# Altium PCB powerhq.PcbDoc
Units mil, origin at the board's own origin, x right, y up, seen from the top; angles counter-clockwise.
Board outline 2010 x 1585 mil, 2 copper layers (Top Layer, Bottom Layer); 27 components, 25 nets, 139 pads, 20 vias.
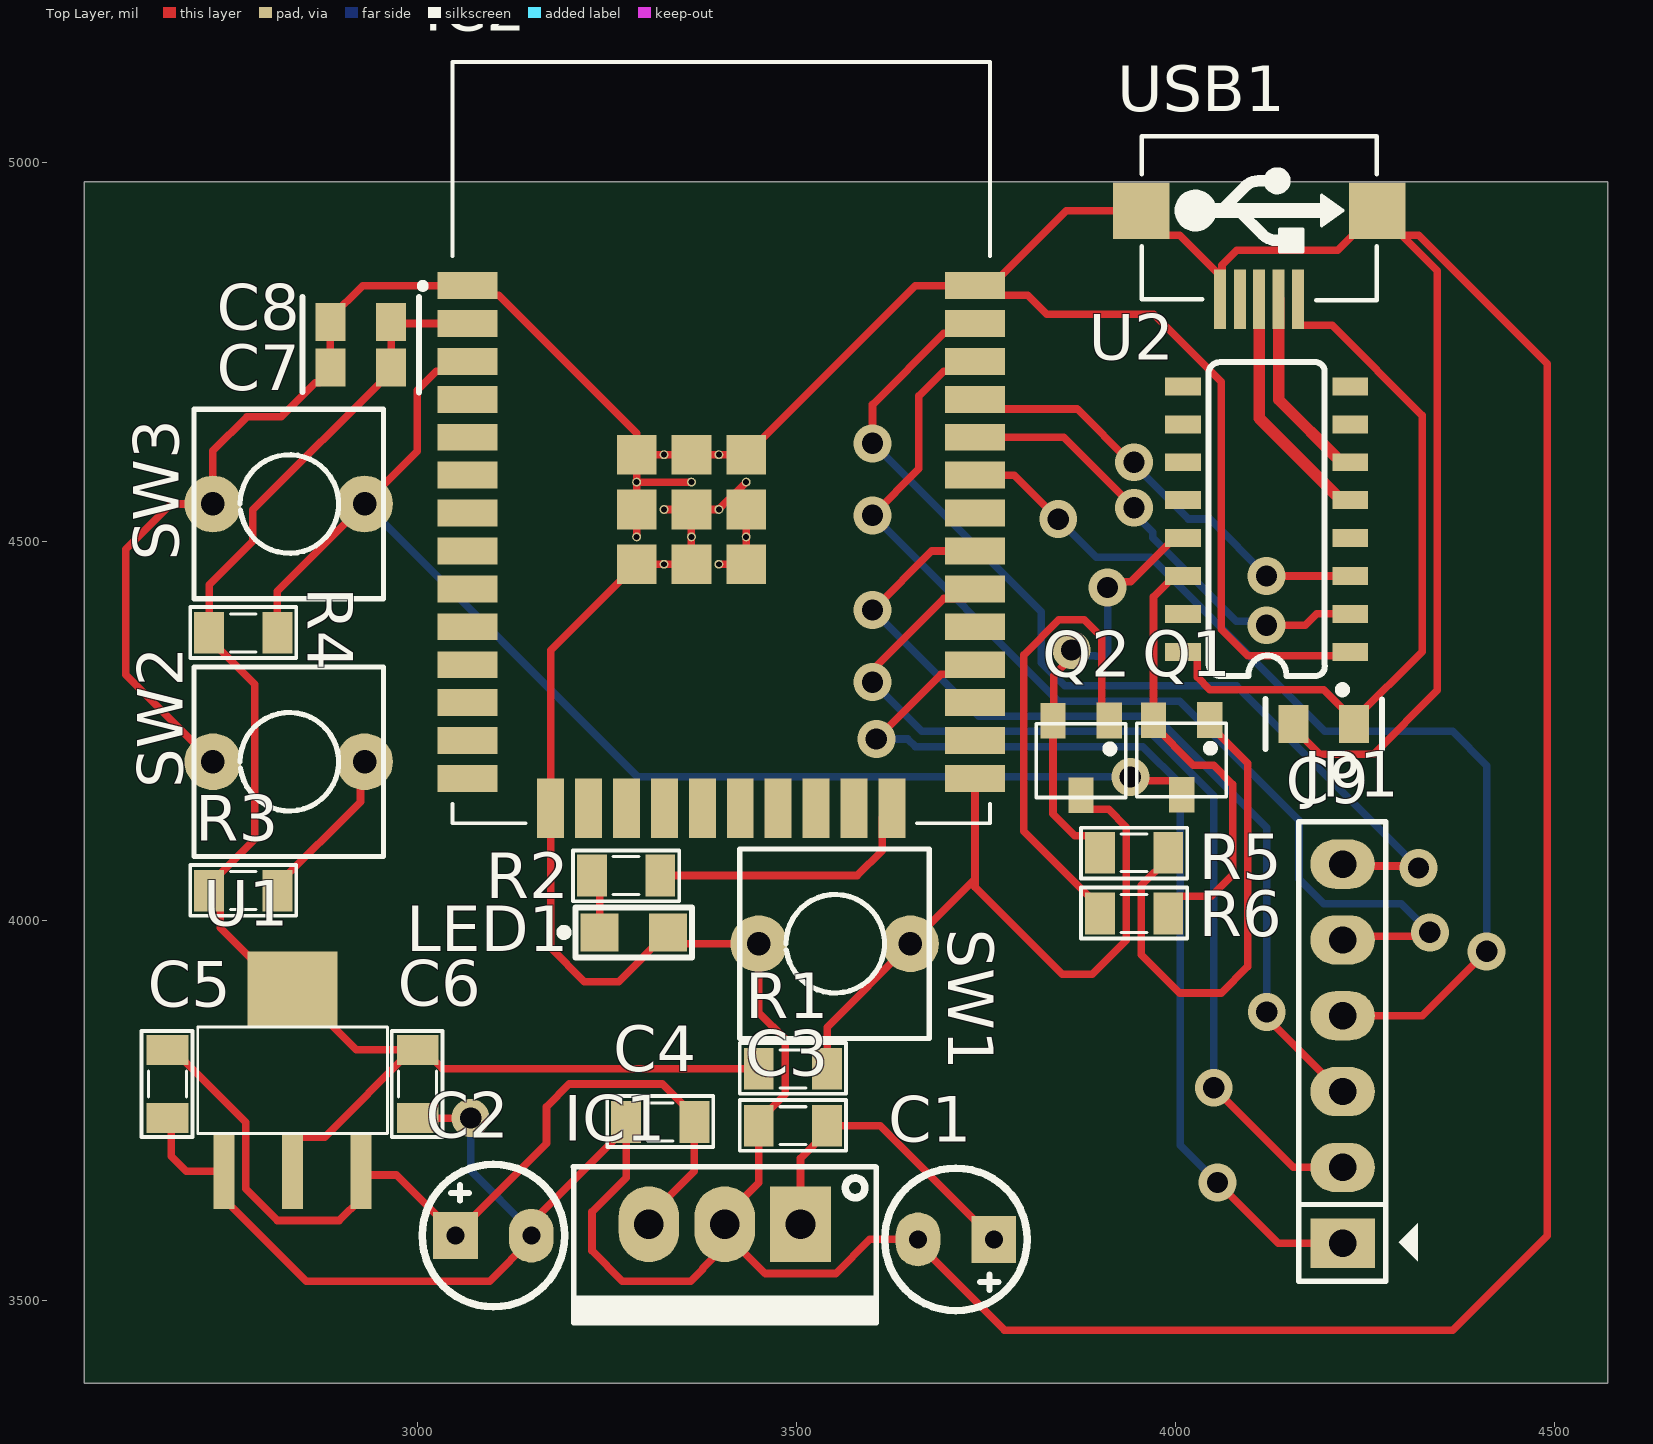
[diagram p0: Top Layer view]
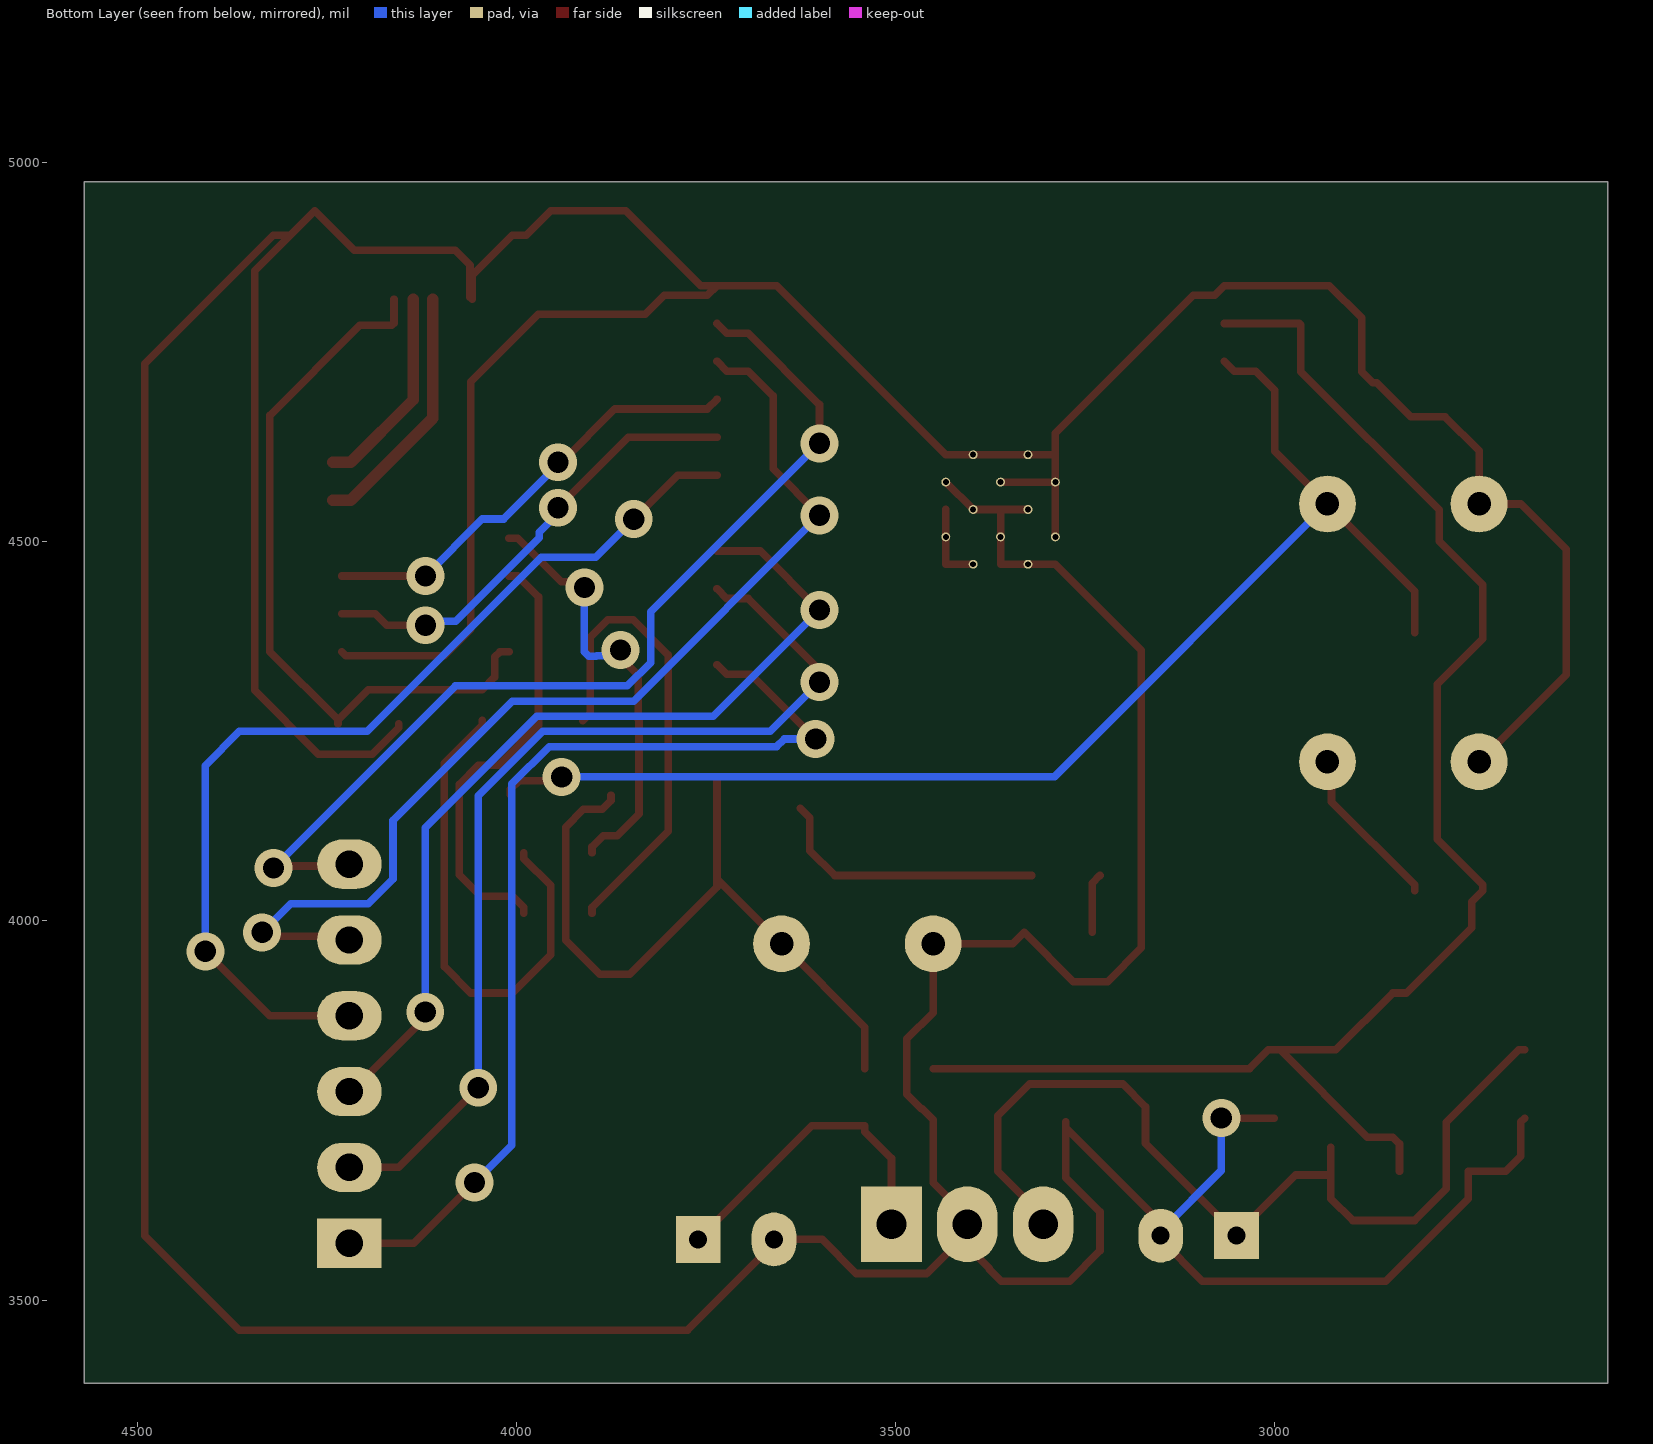
[diagram p1: Bottom Layer view, seen from below]
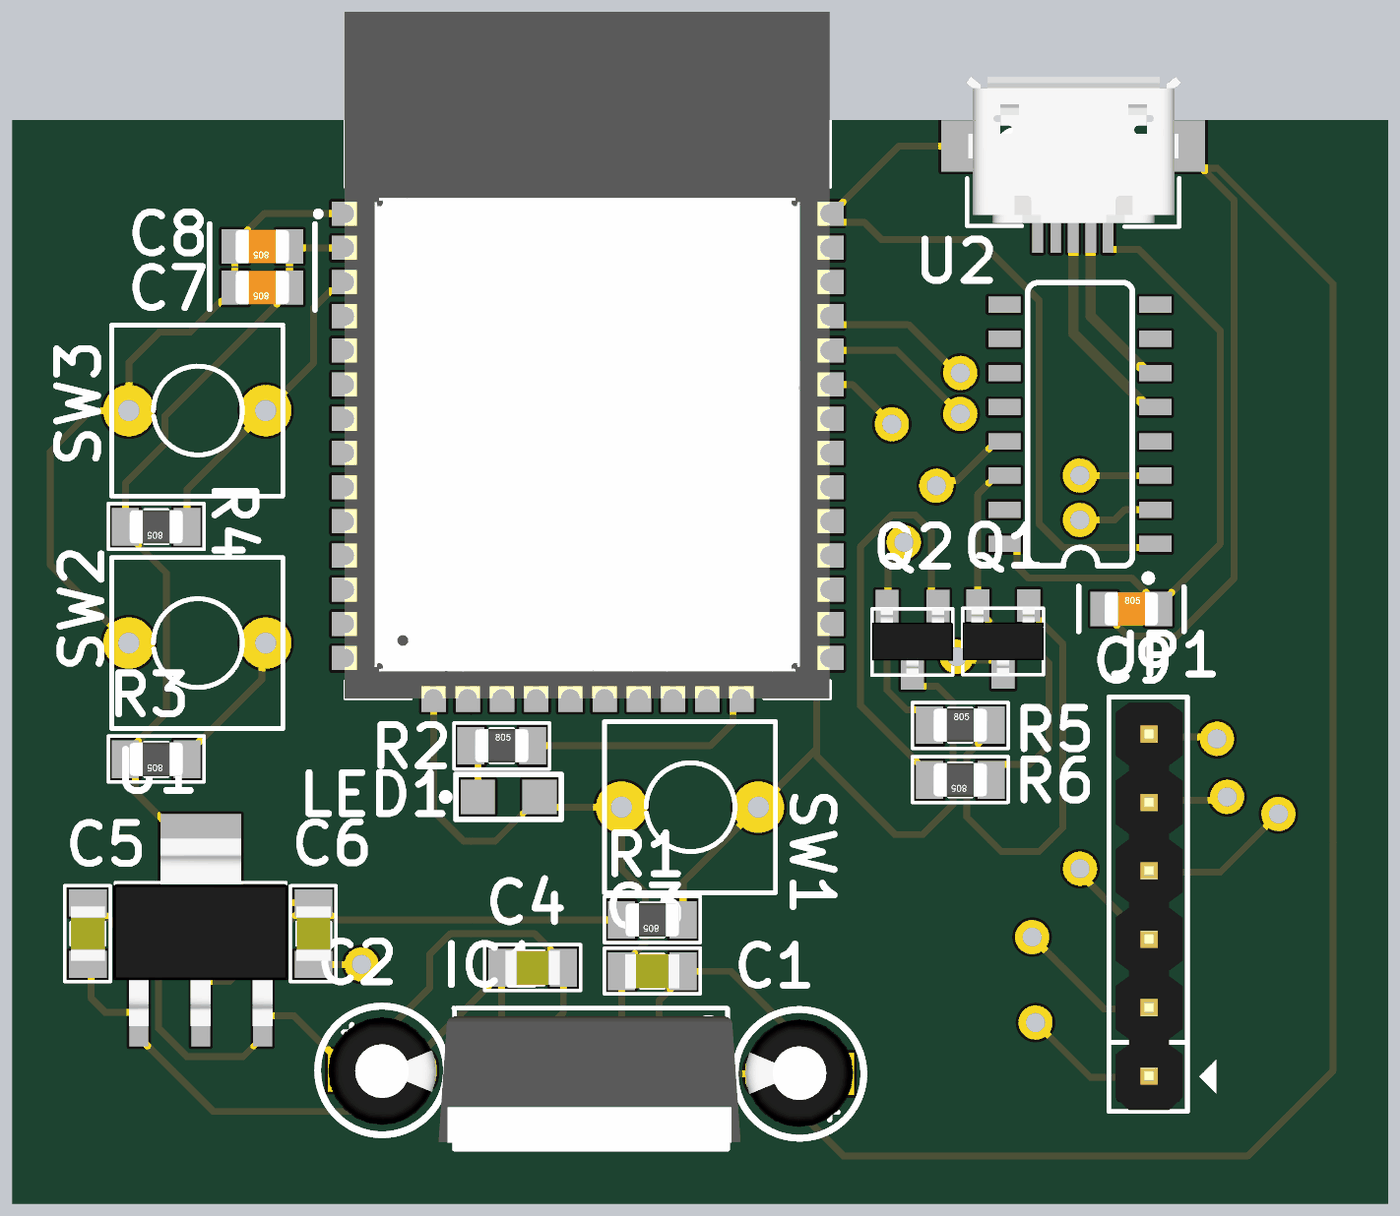
[diagram p2: 3D render of the assembled board from above, using the file's embedded part models]

## Layer stack, top to bottom
Top Solder: solder mask 0.4, Solder Resist, Dk 3.5
Top Layer: signal copper 1.4
Dielectric 1: dielectric 12.6, FR-4, Dk 4.8
Bottom Layer: signal copper 1.4
Bottom Solder: solder mask 0.4, Solder Resist, Dk 3.5

## Board outline
2560,3390 4570,3390 4570,4975 2560,4975

## Design rules (kind name [scope] priority, off if disabled: settings)
Clearance [All] p1: gap=10 ignorepadtopadclearanceinfootprint=FALSE except(0: Arc-Hole Track-Hole SMDPad-Hole THPad-Hole Via-Hole Fill-Hole Poly-Hole Region-Hole Text-Hole)
DiffPairsRouting [All] p1: maxlimit=10 minlimit=10 mostfreqgap=10 toplayer_minwidth=15 toplayer_maxwidth=15 toplayer_prefwidth=15 bottomlayer_minwidth=15 bottomlayer_maxwidth=15 bottomlayer_prefwidth=15 maxuncoupledlength=500
PolygonConnect [All] p1: connectstyle=Relief reliefconductorwidth=10 reliefentries=4 polygonreliefangle="90 Angle" airgapwidth=10
RoutingVias [All] p1: holewidth=28 width=50 viastyle="Through Hole" minholewidth=28 minwidth=50 maxholewidth=28 maxwidth=50
SolderMaskExpansion [All] p1: expansion=4 istentingtop=FALSE
Width [All] p1: maxlimit=10 minlimit=10 preferedwidth=10
29 further rules are at their usual default settings.

## Classes and differential pairs
differential pair class diff: D0
component class MCU: C7 C8 C9 IC2 JP1 LED1 Q1 R1 R2 R3 R4 R5 R6 SW1 SW2 SW3 U2 USB1
component class POWER: C1 C2 C3 C4 C5 C6 IC1 U1
differential pair D0: +D0_P -D0_N

## Components (designator, comment, footprint, x,y, rotation, side; value= is the part's Value field where it differs from the comment)
C1 "25V/10uF" C3MM 3710,3580 r180 top
C2 "10V/1uF" C3MM 3100,3585 r0 top
C3 "100nF" CAP_0805 3495,3730 r180 top value=33p
C4 "100nF" CAP_0805 3320,3735 r180 top value=33p
C5 "10uF" CAP_0805 2670,3785 r270 top value=33p
C6 "22uF" CAP_0805 3000,3785 r270 top value=33p
C7 "10uF" C0805 2925,4730 r180 top value=33p
C8 "10uF" C0805 2925,4790 r180 top value=33p
C9 "100nF" C0805 4195,4260 r0 top value=33p
IC1 "LM7805" QTO-220 3505,3600 r180 top
IC2 "ESP32-WROOM-32" MODULE_ESP32-WROOM-32 3400.49,4630.94 r0 top
JP1 "JP6 PIN" JP6 4220,3575 r90 top value=JP7
LED1 "LED" LED0805 3285,3985 r0 top value="LED 3 ly Single Colour"
Q1 "C1815" SOT23D 4007.6,4215.79 r180 top
Q2 "C1815" SOT23D 3875,4215 r180 top
R1 "10k" RES-SMD-0805 3495,3805 r180 top
R2 "Resistor - SMD" RES-SMD-0805 3275,4060 r0 top
R3 "10k" RES-SMD-0805 2770,4040 r180 top
R4 "10k" RES-SMD-0805 2770,4380 r180 top
R5 "10k" RES-SMD-0805 3945,4090 r0 top
R6 "10k" RES-SMD-0805 3945,4010 r180 top
SW1 "SW" SW2 3650,3970 r180 top value="SW chip 2 pin"
SW2 "SW" SW2 2930,4210 r180 top value="SW chip 2 pin"
SW3 "SW" SW2 2930,4550 r180 top value="SW chip 2 pin"
U1 "LM1117-ADJ" LM1117-SOP 2835,3720 r0 top
U2 "CH340C" SOP-16 4119.76,4530 r90 top
USB1 "USB" USB-M1 4110,4820 r0 top

## Footprints (in the part's own frame and the unit in brackets; to place one, negate y for a bottom-side part, rotate by r counter-clockwise, add the part's x,y. Pads: shape width x height; smd on the part's side, far side on the other; paste and mask are expansions set on the pad)
C3MM [mm]
  rect 1.5x1.58 hole 0.6: 1(-1.27,0)
  oval 1.5x1.8 hole 0.6: 2(1.27,0)
  silkscreen extent -2.39,-2.39 2.39,2.39, body extent -2,-2.03 1.99,1.97, height 7.01
C0805 [mil] "Chip Resistor; Body 2.0 x 1.3 mm (LxW typ)"
  rect 39.37x50 smd: 1(-40,0) 2(40,0)
  silkscreen extent -77,-33 77,33, body extent -39,-25 39,25, height 31
CAP_0805 [mil]
  rect 39.37x55 smd: 1(-45,0) 2(45,0)
  silkscreen extent -70,-34 70,33, body extent -40,-25 40,25, height 24
JP6 [mil] "JP6"
  rect 65x85 hole 36: 1(0,0)
  oval 65x85 hole 36: 2(100,0) 3(200,0) 4(300,0) 5(400,0) 6(500,0)
  silkscreen extent -50,-99 556,58, body extent -48,-50 548,48, height 323
LED0805 [mil] "Chip Resistor; Body 2.0 x 1.3 mm (LxW typ)"
  rect 50x50 smd: 1(-45,0) 2(45,0)
  silkscreen extent -97,-33 77,33, body extent -60,-25 60,25, height 47
LM1117-SOP [mm]
  rect 0.7x2.54 smd: 1(-2.3,-1.27) 2(0,-1.27) 3(2.3,-1.27)
  rect 3x2.54 smd: 2(0,4.826)
  silkscreen extent -3.17,0 3.17,3.56, body extent -3.25,-1.78 3.25,5.18, height 1.68
MODULE_ESP32-WROOM-32 [mm]
  rect 2x0.9 smd: 1(-8.5,5.26) 2(-8.5,3.99) 3(-8.5,2.72) 4(-8.5,1.45) 5(-8.5,0.18) 6(-8.5,-1.09) 7(-8.5,-2.36) 8(-8.5,-3.63) 9(-8.5,-4.9) 10(-8.5,-6.17) 11(-8.5,-7.44) 12(-8.5,-8.71) 13(-8.5,-9.98) 14(-8.5,-11.25) 25(8.5,-11.25) 26(8.5,-9.98) 27(8.5,-8.71) 28(8.5,-7.44) 29(8.5,-6.17) 30(8.5,-4.9) 31(8.5,-3.63) 32(8.5,-2.36) 33(8.5,-1.09) 34(8.5,0.18) 35(8.5,1.45) 36(8.5,2.72) 37(8.5,3.99) 38(8.5,5.26)
  rect 0.9x2 smd: 15(-5.715,-12.25) 16(-4.445,-12.25) 17(-3.175,-12.25) 18(-1.905,-12.25) 19(-0.635,-12.25) 20(0.635,-12.25) 21(1.905,-12.25) 22(3.175,-12.25) 23(4.445,-12.25) 24(5.715,-12.25)
  rect 1.33x1.33 smd: 39_1(-2.835,-0.405) 39_2(-1,-0.405) 39_3(0.835,-0.405) 39_4(-2.835,-2.24) 39_5(-1,-2.24) 39_6(0.835,-2.24) 39_7(-2.835,-4.075) 39_8(-1,-4.075) 39_9(0.835,-4.075)
  round 0.3 hole 0.2: 39_10(-1.917,-0.405) 39_11(-0.082,-0.405) 39_12(-2.835,-1.322) 39_13(-1,-1.322) 39_14(0.835,-1.322) 39_15(-1.917,-2.24) 39_16(-0.082,-2.24) 39_17(-2.835,-3.157) 39_18(-1,-3.157) 39_19(0.835,-3.157) 39_20(-1.917,-4.075) 39_21(-0.082,-4.075)
  silkscreen extent -10.1,-12.75 9,12.75, body extent -9.02,-12.75 8.98,12.75, height 3.2
QTO-220 [mil] "TO-220 - 1-2-3"
  rect 80x100 hole 39: 1(0,0)
  oval 80x100 hole 39: 2(100,0) 3(200,0)
  silkscreen extent -100,-76 300,130, body extent -119,-64 322,121, height 755
RES-SMD-0805 [mil]
  rect 39.37x55 smd: 1(-45,0) 2(45,0)
  silkscreen extent -70,-34 70,33, body extent -39,-25 39,25, height 31
SOP-16 [mm]
  rect 0.6x1.2 smd: 1(-4.445,-2.8) 2(-3.175,-2.8) 3(-1.905,-2.8) 4(-0.635,-2.8) 5(0.635,-2.8) 6(1.905,-2.8) 7(3.175,-2.8) 8(4.445,-2.8) 9(4.445,2.8) 10(3.175,2.8) 11(1.905,2.8) 12(0.635,2.8) 13(-0.635,2.8) 14(-1.905,2.8) 15(-3.175,2.8) 16(-4.445,2.8)
  silkscreen extent -5.84,-2.67 5.26,1.95, body extent -4.95,-3.47 4.95,3.47, height 1.75
SOT23D [mm] "SOT 23C - 1-3-2 - BCE"
  rect 0.85x1.2 smd: 1(-0.95,-1.25) 2(0.94,-1.245) 3(0,1.25)
  silkscreen extent -1.5,-1.14 1.5,1.32, body extent -1.5,-1.17 1.5,1.33, height 1.06
SW2 [mil] "SW button 2pin, 250x 250 mil"
  round 75 hole 31: 1(0,0) 2(200,0)
  silkscreen extent -25,-125 225,125
USB-M1 [mm]
  rect 0.4x2 smd: 1(1.3,0) 2(0.65,0) 3(0,0) 4(-0.65,0) 5(-1.321,0)
  rect 1.9x1.9 smd: 5(-3.95,2.968) 5(3.95,2.968)
  silkscreen extent -3.94,-0.03 3.94,5.46, body extent -3.98,0.11 4,5.54, height 2.71

## Part data
C1 C2: library part "Cap Pol", "Polarized Capacitor (Axial)", LatestRevisionDate=17-Jul-2002, LatestRevisionNote="Re-released for DXP Platform.", PackageReference=POLAR0.8, Published=8-Jun-2000, Publisher="Altium Limited"
C3 C4 C5 C6 C7 C8 C9: library part CapSMD, "Capacitor", LatestRevisionDate=17-Jul-2002, LatestRevisionNote="Re-released for DXP Platform.", PackageReference=RAD-0.3, Published=8-Jun-2000, Publisher="Altium Limited"
IC1: library part LM78xx, "On ap +, from + 5 to + 24VDC"
IC2: "Bluetooth, WiFi Transceiver Module 2.4GHz ~ 2.5GHz Surface Mount", Package="Module Espressif Systems", Digi-Key_Part_Number=1904-1010-1-ND, Digi-Key_Purchase_URL=https://www.digikey.com/product-detail/en/espressif-systems/ESP32-WROOM-32/1904-1010-1-ND/8544305?utm_source=snapeda&utm_medium=aggregator&utm_campaign=symbol, MF="Espressif Systems", MP=ESP32-WROOM-32, SnapEDA_Link=https://www.snapeda.com/parts/ESP32-WROOM-32/Espressif%20Systems/view-part/2753322/?ref=snap
JP1: library part JP6
LED1: "LED Single colour Green and Red"
Q1 Q2: library part 2SC1815, "NPN 600mW, ECB"
R1 R3 R4 R5 R6: library part "Resistor - SMD", "Resistor", Manufacturer="Generic Components", Class=Passive, Published=08/06/2000, Publisher="Altium Hobart Technology Centre"
R2: "Resistor SMD", Manufacturer="Generic Components", Class=Passive, Published=08/06/2000, Publisher="Altium Hobart Technology Centre"
SW1 SW2 SW3: library part SW2, "Switch button 2 pin"
U1: "800mA Low-Dropout Linear Regulator", Creator="Nguyen Ba Bien", Website=http://group3i.net
U2: "USB to serial chip CH340", Package=Package, Availability=Unavailable, Check_prices=https://www.snapeda.com/parts/CH340C/WCH/view-part/5428851/?ref=eda, MF=WCH, MP=CH340C, Price=None, SnapEDA_Link=https://www.snapeda.com/parts/CH340C/WCH/view-part/5428851/?ref=snap
USB1: library part USB-M

## Via types
v1: diameter 50, hole 28, Top Layer to Bottom Layer, 20 vias

## Nets (pads, with @x,y where several pads share a name; then routed paths per layer and width w, separated by ;. In a path a pad name is that pad's centre, name@x,y a point inside that pad or via, vN(x,y) a via of type N, cw(c..) or ccw(c..) an arc to the next point about the centre after c; other vN are vias at no path point)
3V3: C6.1 C7.1 C8.1 IC2.2 R1.2 R3.2 R4.2 U1.2 | length 2083.8
  Top Layer w10: U1.2@2835,3670 2835,3706.22 2843.78,3715 2877.18,3715 C6.1@2992.19,3830 ; IC2.2 2966.97,4788.03 2965,4786.06 C7.1 2965,4724.69 2782.5,4542.19 2782.5,4501.09 2725,4443.59 R4.2 2725,4372.19 2785,4312.19 2785,4107.81 2725,4047.81 R3.2 2739.69,4025.31 2739.69,3991.26 2825.94,3905 2844.06,3905 2919.05,3830 C6.1@2992.19,3830 ; R1.2 3032.82,3805 3007.81,3830 C6.1 C6.1@2992.19,3830
5V: C2.1 C4.1 C5.1 IC1.3 U1.3 | length 1248.8
  Top Layer w10: C5.1 2677.81,3830 2773.23,3734.59 2773.23,3646.78 2815.01,3605 2896.77,3605 2925.55,3633.78 U1.3@2925.55,3665 ; U1.3@2925.55,3701.22 U1.3 U1.3@2925.55,3665 ; C2.1 C2.1@3050,3586.57 ; IC1.3 3305,3610 3365,3670 C4.1 3365,3742.81 3322.82,3785 3200,3785 3170,3755 3170,3706.57 C2.1@3050,3586.57 ; U1.3@2925.55,3665 2971.57,3665 C2.1@3050,3586.57
12V: C1.1 C3.1 IC1.1 | length 427.6
  Top Layer w10: IC1.1 3505,3687.18 3540,3722.19 C3.1 3610,3730 3733.9,3606.1 3735.47,3606.1 3760,3581.57 C1.1
D0_N: U2.5 USB1.3 | length 333.4
  Top Layer w15: USB1.3 4110,4663.19 4218.19,4555 U2.5 U2.5@4241.81,4555
D0_P: U2.6 USB1.2 | length 272.8
  Top Layer w15: USB1.2 4135.59,4687.6 4218.19,4605 U2.6 U2.6@4241.81,4605
DTR: Q2.2 R5.1 U2.13 | length 579
  Top Layer w10: v1(3862.43,4357.43) 3862.43,4347.28 3839.22,4324.07 3839.22,4265.22 Q2.2 3838,4141.22 3866.72,4112.5 3885.31,4112.5 3900,4097.81 R5.1 ; v1(3910,4440) 3917.65,4447.65 3940.37,4447.65 3997.72,4505 U2.13
  Bottom Layer w10: v1(3862.43,4357.43) 3870.08,4349.77 3893.51,4349.77 3894.14,4349.14 3904.14,4349.14 3910,4355 v1(3910,4440)
EN: IC2.3 Q1.3 R4.1 SW3.1 | length 1719
  Top Layer w10: R4.1 2815,4435 SW3.1 2999.69,4619.69 2999.69,4700.17 3024.83,4725.31 3053.13,4725.31 IC2.3 ; v1(3940,4190) 3944.8,4185.2 3995.87,4185.2 4007.6,4173.46 Q1.3
  Bottom Layer w10: SW3.1 3290,4190 v1(3940,4190)
GND: C1.2 C2.2 C3.2 C4.2 C5.2 C6.2 C7.2 C8.2 C9.1 IC1.2 IC2.1 IC2.15 IC2.38 IC2.39_1 IC2.39_2 IC2.39_3 IC2.39_4 IC2.39_5 IC2.39_6 IC2.39_7 IC2.39_8 IC2.39_9 IC2.39_10 IC2.39_11 IC2.39_12 IC2.39_13 IC2.39_14 IC2.39_15 IC2.39_16 IC2.39_17 IC2.39_18 IC2.39_19 IC2.39_20 IC2.39_21 LED1.2 SW1.2 SW2.2 SW3.2 U1.1 U2.1 USB1.5 | length 10409.6
  Top Layer w10: C5.2 2675,3735 2675,3690 2695,3670 U1.1 2744.45,3633.78 2853.23,3525 3095,3525 3150,3580 C2.2 3150,3602.18 C4.2@3275,3727.19 ; SW2.2 2615,4325 2615,4490 2675,4550 SW3.2 2730,4620 2775,4665 2820,4665 2865,4710 2870.31,4710 2885,4724.69 C7.2 C8.2 2885,4795.31 2927.72,4838.03 IC2.1 3078.56,4825.31 3106.86,4825.31 3288.88,4643.3 IC2.39_1 ; C6.2 v1(3070,3740) ; C4.2 C4.2@3275,3727.19 ; IC2.39_17 IC2.39_4 IC2.39_12 ; IC2.39_15 IC2.39_5 ; IC2.39_13 IC2.39_12 ; IC2.39_21 IC2.39_9 IC2.39_19 IC2.39_6 ; IC2.39_14 IC2.39_16 IC2.39_5 ; C9.1 4155,4254.69 4189.69,4220 4260.9,4220 4345,4304.1 4345,4857.35 USB1.5@4297.91,4904.44 ; U2.1 4225,4350 4095,4350 4060,4385 4060,4711.17 3971.17,4800 3830,4800 3804.69,4825.31 3747.85,4825.31 IC2.38 ; C4.2@3275,3727.19 3275,3661.25 3230,3616.25 3230,3565 3270,3525 3360,3525 3375.8,3540.8 3375.8,3541.86 3405,3571.06 IC1.2@3405,3588.79 ; IC2.39_12 IC2.39_1 ; IC2.39_1 IC2.39_10 IC2.39_2 IC2.39_11 IC2.39_3 3656.4,4838.03 IC2.38 ; IC2.39_5 IC2.39_18 IC2.39_8 IC2.39_20 IC2.39_7 3175.49,4357.13 IC2.15 3175.49,3964.51 3220,3920 3265,3920 LED1.2 3345,3970 SW1.2 3450,3879.19 3484.69,3844.51 3484.69,3771.29 3465.9,3752.5 3464.69,3752.5 3450,3737.81 C3.2 3450,3655 3405,3610 IC1.2 IC1.2@3405,3588.79 ; IC1.2@3405,3588.79 3458.79,3535 3551.21,3535 3596.21,3580 C1.2 3660,3574.09 3774.09,3460 4365,3460 4490,3585 4490,4735 4320.56,4904.44 USB1.5@4297.91,4904.44 ; IC2.38 3756.79,4838.03 3855.6,4936.84 3954.49,4936.84 3986.89,4904.44 4005.06,4904.44 4058,4851.5 4058,4820 4060.87,4822.87 4060.87,4864.92 4080.63,4884.68 4213.35,4884.68 4265.51,4936.84 USB1.5@4297.91,4904.44
  Bottom Layer w10: v1(3070,3740) 3070,3670.91 3150,3590.91 C2.2
IO_0: IC2.25 Q2.3 R1.1 SW1.1 | length 969.9
  Top Layer w10: R1.1 3540,3860 SW1.1 3735.14,4055.14 ; IC2.25 3735.14,4055.14 ; Q2.3 3875,4158.9 3886.73,4147.16 3911.23,4147.16 3934.68,4123.71 3934.68,4048.14 3934.69,3974.69 3890,3930 3850,3930 3735.14,4044.86 3735.14,4055.14
IO_2: IC2.24 R2.2 | length 367.5
  Top Layer w10: R2.2 3580,4060 3612.78,4092.78 3612.78,4135.94 IC2.24
IO_16: R3.1 SW2.1 | length 217.6
  Top Layer w10: R3.1 2815,4047.81 2924.69,4157.5 2924.69,4204.69 SW2.1
NetIC2_28: IC2.28 JP1.1 | length 1340.4
  Top Layer w10: v1(3605,4240) 3690.31,4325.31 3722.42,4325.31 IC2.28 ; v1(4055,3655) 4135,3575 JP1.1
  Bottom Layer w10: v1(3605,4240) 3646.72,4240 3656.72,4230 3956.57,4230 4005.78,4180.78 4005.78,3704.22 v1(4055,3655)
NetIC2_30: IC2.30 JP1.2 | length 1306.1
  Top Layer w10: v1(3600,4315) 3600,4331.19 3694.12,4425.31 3722.42,4425.31 IC2.30 ; v1(4050,3780) 4155,3675 JP1.2
  Bottom Layer w10: v1(3600,4315) 3665,4250 3964.85,4250 4050,4164.85 v1(4050,3780)
NetIC2_31: IC2.31 JP1.3 | length 1197.3
  Top Layer w10: v1(3600,4410) 3678.03,4488.03 IC2.31 ; v1(4120,3880) 4120,3872.5 4217.5,3775 JP1.3
  Bottom Layer w10: v1(3600,4410) 3740,4270 3973.14,4270 4120,4123.14 v1(4120,3880)
NetIC2_33: IC2.33 JP1.4 | length 1303.7
  Top Layer w10: IC2.33 3786.97,4588.03 v1(3845,4530) ; JP1.4 4325,3875 v1(4410,3960)
  Bottom Layer w10: v1(3845,4530) 3895,4480 3966.72,4480 4196.72,4250 4365,4250 4410,4205 v1(4410,3960)
NetIC2_36: IC2.36 JP1.5 | length 1402.8
  Top Layer w10: v1(3600,4535) 3661.2,4596.2 3661.2,4692.4 3694.12,4725.31 3722.42,4725.31 IC2.36 ; JP1.5 4225,3980 4330,3980 v1(4335,3985)
  Bottom Layer w10: v1(3600,4535) 3845,4290 4005,4290 4162.5,4132.5 4162.5,4055.32 4195.32,4022.5 4297.5,4022.5 v1(4335,3985)
NetIC2_37: IC2.37 JP1.6 | length 1323.7
  Top Layer w10: v1(3600,4630) 3600,4681.19 3694.12,4775.31 3722.42,4775.31 IC2.37 ; JP1.6 4222.5,4072.5 4317.5,4072.5 v1(4320,4070)
  Bottom Layer w10: v1(3600,4630) 3822.43,4407.57 3822.43,4340.86 3853.28,4310 4080,4310 v1(4320,4070)
NetLED1_1: LED1.1 R2.1 | length 79.1
  Top Layer w10: R2.1 3240,4050 LED1.1
NetQ1_1: Q1.1 R5.2 | length 670.7
  Top Layer w10: R5.2 3990,4082.19 3954.69,4046.87 3954.69,3955.31 4005,3905 4060,3905 4095,3940 4095,4208.11 4045,4258.11 Q1.1
NetQ2_1: Q2.1 R6.2 | length 628.7
  Top Layer w10: R6.2 3900,4017.81 3799.22,4118.6 3799.22,4350.78 3845.86,4397.43 3878.99,4397.43 3902.43,4373.99 3902.43,4274.19 Q2.1
RST: Q1.2 R6.1 U2.14 | length 586.6
  Top Layer w10: R6.1 3990,4017.81 4004.69,4032.5 4046.64,4032.5 4075,4060.86 4075,4180 4049.8,4205.2 4023.3,4205.2 3970.6,4257.9 Q1.2 3970.6,4427.88 3997.72,4455 U2.14
RX: IC2.35 U2.3 | length 593.4
  Top Layer w10: IC2.35 3747.85,4675.31 3869.69,4675.31 3940,4605 v1(3945,4605) ; v1(4119.76,4455) U2.3
  Bottom Layer w10: v1(3945,4605) 3945,4601.57 4016.36,4530.21 4044.56,4530.21 v1(4119.76,4455)
TX: IC2.34 U2.2 | length 612.6
  Top Layer w10: IC2.34 3851.97,4638.03 v1(3945,4545) ; v1(4119.76,4390) 4170.72,4390 4185.72,4405 U2.2
  Bottom Layer w10: v1(3945,4545) 3945,4537.07 3969.32,4512.75 3969.32,4505.68 4079.76,4395.24 4114.53,4395.24 v1(4119.76,4390)
V3: U2.4
VCC: C9.2 U2.16 USB1.1 | length 967.8
  Top Layer w10: U2.16 4021.34,4355 4028.15,4348.19 4028.15,4321.85 4045,4305 4195.31,4305 C9.2@4235,4265.31 ; USB1.1 4161.18,4788.5 4164.06,4785.63 4206.02,4785.63 4325,4666.65 4325,4355.31 C9.2@4235,4265.31 ; C9.2 C9.2@4235,4265.31
pads on no net: IC2.4 IC2.5 IC2.6 IC2.7 IC2.8 IC2.9 IC2.10 IC2.11 IC2.12 IC2.13 IC2.14 IC2.16 IC2.17 IC2.18 IC2.19 IC2.20 IC2.21 IC2.22 IC2.23 IC2.26 IC2.27 IC2.29 IC2.32 U2.7 U2.8 U2.9 U2.10 U2.11 U2.12 U2.15 USB1.4

## Text inside footprints (layer, text, board x,y; h text height)
IC2: Mechanical 13 "ANTENNA" at 3164.27,4985.28 h70